# EAGLE board LLB (EAGLE 5.10)
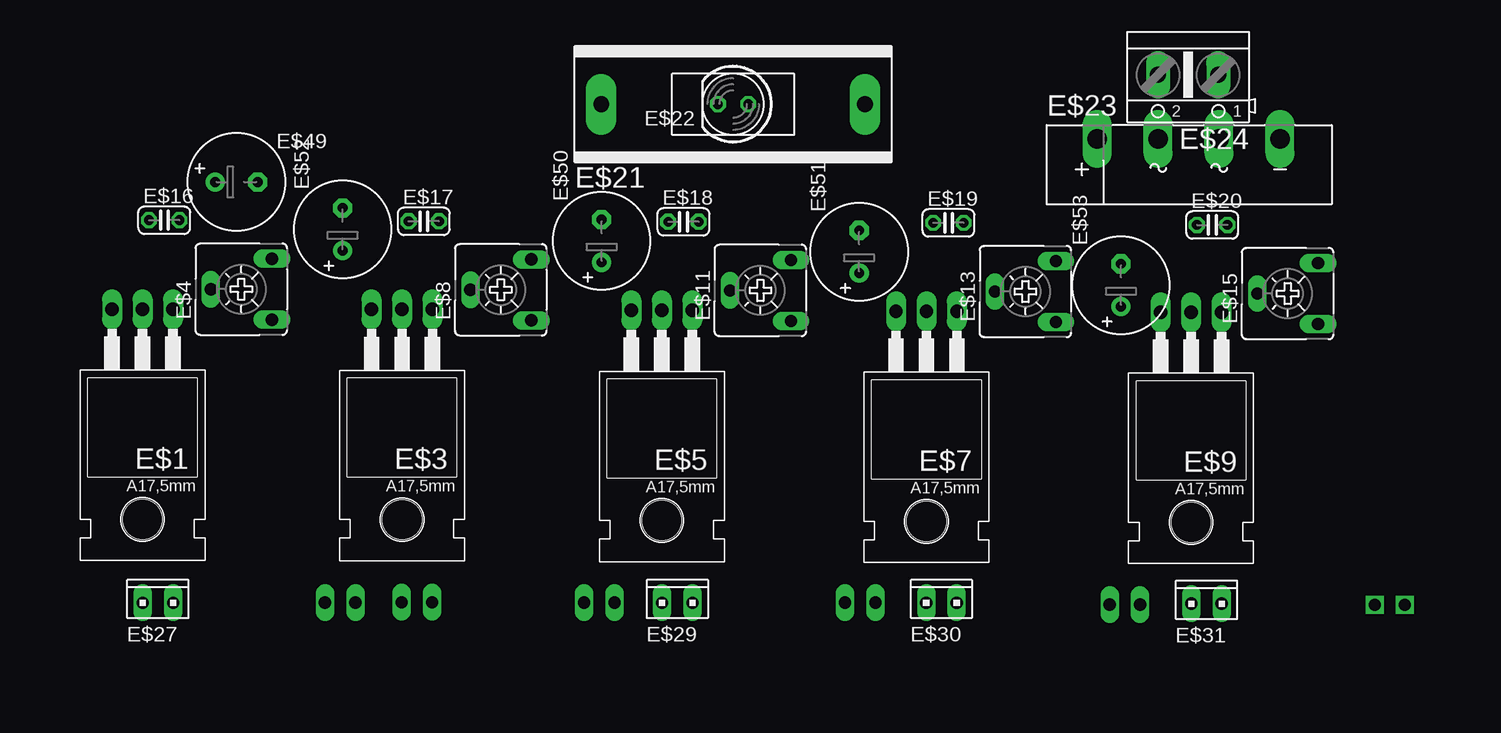
[diagram p0: board, top side]
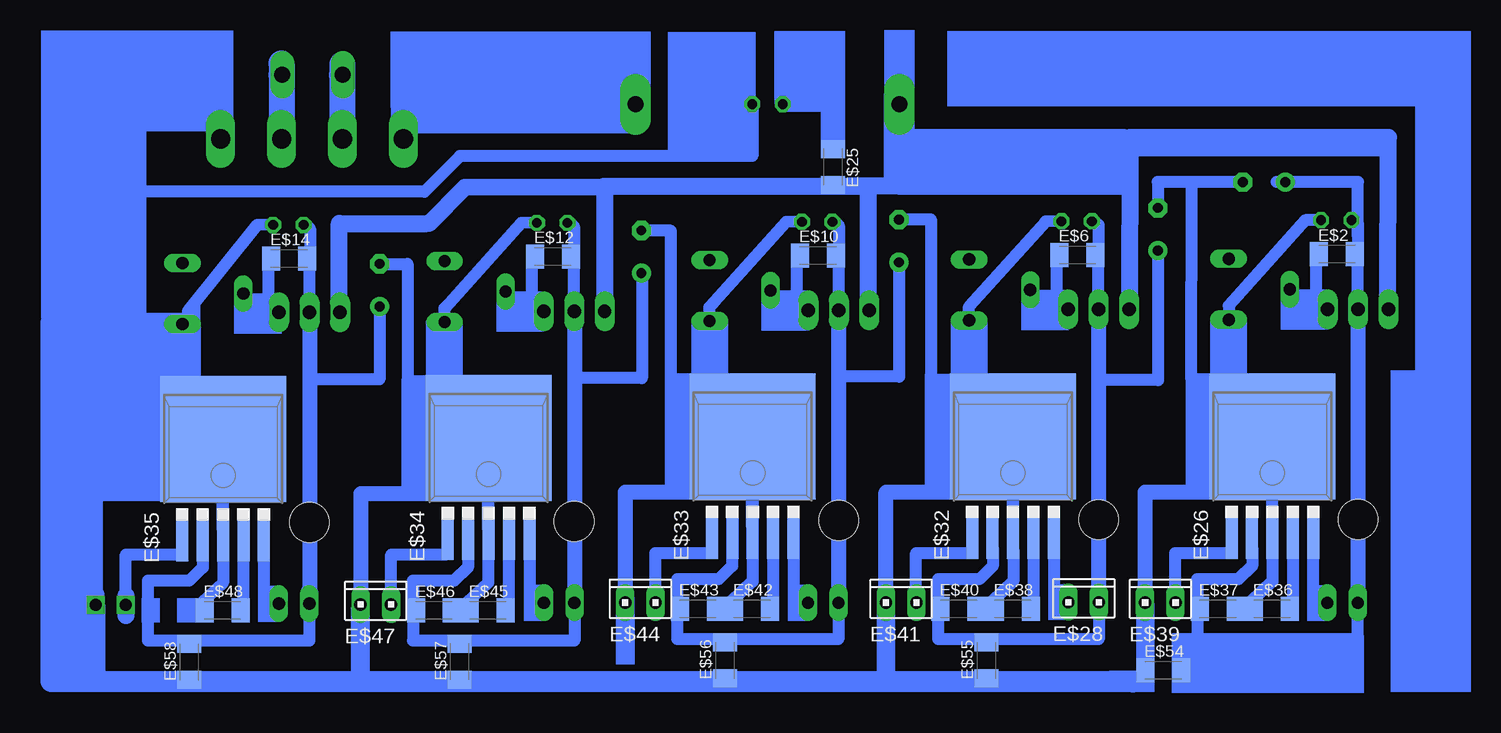
[diagram p1: board, bottom side, seen from below]

No outline drawn. Coordinates in mm, seen from the top.
Copper layers (1*16): Top 0.035mm / dielectric 1.5mm / Bottom 0.035mm
Design rules "default": minimum track width 10mil, minimum drill 24mil, track to track 8mil, track to pad 8mil, pad to pad 8mil, via to via 8mil, smd to smd 8mil, copper to edge 40mil, drill to drill 8mil, minimum pad ring 10mil, minimum via ring 8mil, stop-mask expansion 4mil, vias tented up to drill 0mil, thermal gap 10mil

## Footprints (pad centres in the part's own frame; a part is rotated, then mirrored left to right if it is on the bottom)
TO220 = drill 1.118 long: 1 -2.54,-6.35; 2 0,-6.35; 3 2.54,-6.35 | hole 3.302: 0,11.176
C1206K = smd 1.5 x 2: 1 -1.5,0; 2 1.5,0
CA6V = drill 1.016 long: A -2.54,-2.54; E 2.54,-2.54; S 0,2.54
C025-024X044 = drill 0.813 octagon: 1 -1.27,0; 2 1.27,0
SH22 = drill 1.321 pad 2.54 long: 1 -10.998,0; 2 10.998,0
LED5MM = drill 0.813 octagon: A -1.27,0; K 1.27,0
KBU = drill 1.6 long: + -7.62,2.54; - 7.62,2.54; AC1 -2.54,2.54; AC2 2.54,2.54
AK500/2 = drill 1.321 long: 1 -2.515,0; 2 2.515,0
TO220-58 = smd 1 x 3.4: 1 -3.4,-5; 2 -1.7,-5; 3 0,-5; 4 1.7,-5; 5 3.4,-5 | smd 10.5 x 10.5: 6 0,3.5
10X02MTA = drill 1.016 long: 1 1.27,0; 2 -1.27,0
E3,5-8 = drill 0.813 pad 1.6 round: + -1.778,0 | drill 0.813 pad 1.6 octagon: - 1.778,0

## Placement (x,y rotation side)
E$1  [TO220]  2.72,25.38 180 top
E$2  [C1206K]  4.47,36.32 0 bottom
E$3  [TO220]  24.35,25.37 180 top
E$4  [CA6V]  10.96,33.4 90 top
E$5  [TO220]  46.01,25.29 180 top
E$6  [C1206K]  26.1,36.27 0 bottom
E$7  [TO220]  68.07,25.21 180 top
E$8  [CA6V]  32.59,33.35 90 top
E$9  [TO220]  90.13,25.13 180 top
E$10  [C1206K]  47.74,36.22 0 bottom
E$11  [CA6V]  54.23,33.3 90 top
E$12  [C1206K]  69.83,36.13 0 bottom
E$13  [CA6V]  76.32,33.21 90 top
E$14  [C1206K]  91.82,35.96 0 bottom
E$15  [CA6V]  98.18,33.04 90 top
E$16  [C025-024X044]  4.53,39.16 0 top
E$17  [C025-024X044]  26.17,39.07 0 top
E$18  [C025-024X044]  47.81,39.03 0 top
E$19  [C025-024X044]  69.9,38.94 0 top
E$20  [C025-024X044]  91.89,38.76 0 top
E$21  [SH22]  51.96,48.83 0 top
E$22  [LED5MM]  51.95,48.84 180 top
E$23  [KBU]  89.92,43.4 0 top
E$24  [AK500/2]  89.88,51.29 180 top
E$25  [C1206K]  46.49,43.6 270 bottom
E$26  [TO220-58]  9.86,17.63 0 bottom
E$27  [10X02MTA]  4,7.26 0 top
E$28  [10X02MTA]  25.59,7.3 0 bottom
E$29  [10X02MTA]  47.31,7.26 0 top
E$30  [10X02MTA]  69.32,7.26 0 top
E$31  [10X02MTA]  91.41,7.18 0 top
E$32  [TO220-58]  31.48,17.63 0 bottom
E$33  [TO220-58]  53.18,17.62 0 bottom
E$34  [TO220-58]  75.2,17.52 0 bottom
E$35  [TO220-58]  97.33,17.42 0 bottom
E$36  [C1206K]  9.9,6.74 0 bottom
E$37  [C1206K]  14.41,6.74 0 bottom
E$38  [C1206K]  31.51,6.74 0 bottom
E$39  [10X02MTA]  19.2,7.27 0 bottom
E$40  [C1206K]  36.02,6.74 0 bottom
E$41  [10X02MTA]  40.81,7.27 0 bottom
E$42  [C1206K]  53.24,6.74 0 bottom
E$43  [C1206K]  57.75,6.74 0 bottom
E$44  [10X02MTA]  62.54,7.27 0 bottom
E$45  [C1206K]  75.27,6.62 0 bottom
E$46  [C1206K]  79.75,6.61 0 bottom
E$47  [10X02MTA]  84.61,7.11 0 bottom
E$48  [C1206K]  97.38,6.62 0 bottom
E$49  [E3,5-8]  10.55,42.34 0 top
E$50  [E3,5-8]  40.99,37.43 90 top
E$51  [E3,5-8]  62.46,36.53 90 top
E$52  [E3,5-8]  19.4,38.4 90 top
E$53  [E3,5-8]  84.28,33.74 90 top
E$54  [C1206K]  18.95,1.63 0 bottom
E$55  [C1206K]  33.71,2.45 90 bottom
E$56  [C1206K]  55.51,2.45 90 bottom
E$57  [C1206K]  77.6,2.35 90 bottom
E$58  [C1206K]  100.15,2.32 90 bottom

## Library data of the parts
E$1 E$3 E$5 E$7 E$9 = ref-packages
E$2 E$6 E$10 E$12 E$14 E$25 E$36-E$38 E$40 E$42 E$43 E$45 E$46 E$48 E$54-E$58 = resistor
E$4 E$8 E$11 E$13 E$15 = pot
E$16-E$20 E$49-E$53 = rcl
E$21 = fuse
E$22 = led
E$23 = rectifier
E$24 = con-ptr500
E$26 E$32-E$35 = ref-packages-longpad
E$27-E$31 E$39 E$41 E$44 E$47 = con-amp

## Tracks (layer width: path | path; a pad name or v marks a point on that pad's centre or on a via)
S$1
  Bottom 1.422: 21.79,31.51 21.74,46.06 0.19,46.06 0.24,31.77
S$2
  Bottom 1.422: 80.17,38.88 77.17,41.9 65.58,41.97
S$3
  Bottom 1.016: 2.72,31.75 2.72,36.8 2.76,36.8
  Bottom 1.27: 2.72,31.75 2.72,7.29
S$4
  Bottom 1.016: 5.27,31.78 6.21,32.72 6.21,36.01
S$5
  Bottom 1.016: 24.35,31.7 24.35,36.75 24.39,36.75
S$6
  Bottom 1.016: 26.9,31.73 27.84,32.67 27.84,35.96
S$7
  Bottom 1.016: 45.99,31.65 45.99,36.7 46.03,36.7
S$8
  Bottom 1.016: 48.54,31.68 49.48,32.62 49.48,35.91
S$9
  Bottom 1.016: 68.08,31.56 68.08,36.61 68.12,36.61
S$10
  Bottom 1.016: 70.63,31.59 71.57,32.53 71.57,35.82
S$11
  Bottom 1.016: 90.13,31.39 90.13,36.44
S$12
  Bottom 1.016: 92.49,31.42 93.55,32.88 93.55,36.17
S$13
  Bottom 1.016: 3.18,39.31 2.72,38.85 2.72,37.07
S$14
  Bottom 1.016: 5.82,39.18 7.12,39.15 13.5,32.03 13.5,30.79
S$15
  Bottom 1.016: 24.82,39.22 24.36,38.76 24.36,36.98
S$16
  Bottom 1.016: 27.46,39.09 28.76,39.06 35.14,31.94
S$17
  Bottom 1.016: 46.46,39.18 46,38.72 46,36.94
S$18
  Bottom 1.016: 49.1,39.05 50.4,39.02 56.78,31.9
S$19
  Bottom 1.016: 68.55,39.09 68.09,38.63 68.09,36.85
S$20
  Bottom 1.016: 71.19,38.96 72.49,38.93 78.87,31.81
S$21
  Bottom 1.016: 90.54,38.91 90.08,38.45 90.08,36.67
S$22
  Bottom 1.016: 93.18,38.78 94.48,38.75 100.25,31.57
S$23
  Bottom 1.016: 35.17,30.73 35.17,31.87 35.14,31.9
S$24
  Bottom 1.016: 56.8,30.72 56.8,31.89 56.5,32.19
S$25
  Bottom 1.016: 78.86,30.64 78.86,31.83 78.6,32.09
S$26
  Bottom 1.016: 99.7,30.66 99.7,31.97
S$27
  Bottom 2.184: 87.4,52.16 87.42,51.29 87.42,45.75
S$28
  Bottom 2.184: 92.45,52.21 92.46,51.28 92.46,45.96
S$29
  Bottom 2.184: 62.98,48.73 82.3,48.73 82.23,44.74
S$30
  Bottom 1.778: 100.75,30.55 104.63,30.55 104.62,47.46 97.53,47.46 97.48,45.25
S$31
  Bottom 1.016: 53.2,48.86 53.2,44.5 77.59,44.5 80.55,41.54 104.27,41.54 104.27,41.6
S$32
  Bottom 1.27: 24.37,31.84 24.37,7.38
S$33
  Bottom 1.27: 46.03,31.75 46.03,7.29
S$34
  Bottom 1.27: 68.04,31.75 68.04,7.29
S$35
  Bottom 1.27: 90.13,31.67 90.13,8.19 90.13,7.21
  Bottom 1.422: 90.13,8.19 90.13,6.53 | 107.93,7.94 107.93,6.28 | 105.43,7.85 105.43,6.19
S$36
  Bottom 1.016: 6.48,12.17 6.48,8.26 5.26,8.26
S$37
  Bottom 1.016: 28.07,12.25 28.07,8.34 26.85,8.34
S$38
  Bottom 1.016: 49.78,12.19 49.78,8.28 48.56,8.28
S$39
  Bottom 1.016: 71.78,12.19 71.78,8.28 70.56,8.28
S$40
  Bottom 1.016: 93.93,12.1 93.93,8.19 92.71,8.19
S$41
  Bottom 1.016: 9.85,13.98 9.85,17.13
S$42
  Bottom 1.016: 31.5,13.57 31.5,17.48 31.48,17.48
S$43
  Bottom 1.016: 53.17,13.41 53.17,17.53 53.23,17.7
S$44
  Bottom 1.016: 75.2,13.11 75.2,16.9 75.25,16.9
S$45
  Bottom 1.016: 97.32,12.91 97.32,17.09
S$46
  Bottom 1.016: 8.16,12.37 8.16,6.29
S$47
  Bottom 1.016: 9.85,11.71 9.85,9.04 11.65,7.35
S$48
  Bottom 1.016: 11.55,11.83 11.55,10.32 12.69,9.21 16.13,9.21 16.13,6.36
S$49
  Bottom 1.016: 16.13,6.49 16.13,4.21 2.74,4.21 2.74,7.29
S$50
  Bottom 1.016: 17.95,7.27 17.95,11.41 13.39,11.41
S$51
  Bottom 1.27: 20.46,7.26 20.46,16.49 13.47,16.49
S$52
  Bottom 1.016: 31.46,13.98 31.46,17.13
S$53
  Bottom 1.016: 29.77,12.37 29.77,6.29
S$54
  Bottom 1.016: 31.46,11.71 31.46,9.04 33.26,7.35
S$55
  Bottom 1.016: 33.16,11.83 33.16,10.32 34.3,9.21 37.74,9.21 37.74,6.36
S$56
  Bottom 1.016: 37.74,6.49 37.74,4.21 24.35,4.21
S$57
  Bottom 1.016: 39.56,7.27 39.56,11.41 35,11.41
S$58
  Bottom 1.27: 42.07,7.26 42.07,16.49 35.08,16.49
S$59
  Bottom 1.016: 53.23,13.57 53.23,17.48
S$60
  Bottom 1.016: 53.19,13.98 53.19,17.13
S$61
  Bottom 1.016: 51.5,12.37 51.5,6.29
S$62
  Bottom 1.016: 53.19,11.71 53.19,9.04 54.99,7.35
S$63
  Bottom 1.016: 54.89,11.83 54.89,10.32 56.03,9.21 59.47,9.21 59.47,6.36
S$64
  Bottom 1.016: 59.47,6.49 59.47,4.21 46.08,4.21
S$65
  Bottom 1.016: 61.29,7.27 61.29,11.41 56.73,11.41
S$66
  Bottom 1.27: 63.8,7.26 63.8,16.49 56.81,16.49
S$67
  Bottom 1.016: 75.2,13.29 75.2,17.41
S$68
  Bottom 1.016: 75.26,13.45 75.26,17.36
S$69
  Bottom 1.016: 75.22,13.86 75.22,17.01
S$70
  Bottom 1.016: 73.53,12.25 73.53,6.17
S$71
  Bottom 1.016: 75.22,11.59 75.22,8.92 77.02,7.23
S$72
  Bottom 1.016: 76.92,11.71 76.92,10.2 78.06,9.09 81.5,9.09 81.5,6.24
S$73
  Bottom 1.016: 81.5,6.37 81.5,4.09 68.05,4.09 68.05,7.28
S$74
  Bottom 1.016: 83.32,7.15 83.32,11.29 78.76,11.29
S$75
  Bottom 1.27: 85.83,7.14 85.83,16.37 78.84,16.37
S$76
  Bottom 1.016: 97.31,13.11 97.31,16.9
S$77
  Bottom 1.016: 97.31,13.29 97.31,17.41
S$78
  Bottom 1.016: 97.37,13.45 97.37,17.36
S$79
  Bottom 1.016: 97.33,13.86 97.33,17.01
S$80
  Bottom 1.016: 95.64,12.25 95.64,6.17
S$81
  Bottom 1.016: 97.33,11.59 97.33,8.92 99.13,7.23
S$82
  Bottom 1.016: 99.03,11.71 99.03,10.2 100.17,9.09 103.61,9.09 103.61,6.24
S$83
  Bottom 1.016: 103.61,6.37 103.61,4.09 90.14,4.09 90.14,7.2
S$84
  Bottom 1.016: 105.43,7.15 105.43,11.29 100.87,11.29
S$85
  Bottom 1.27: 107.94,7.14 107.94,16.37 100.95,16.37
S$86  (via drill 1)
  other vias: 107.93,7.1
S$87  (via drill 1)
  other vias: 105.43,7.1
S$88
  Bottom 1.016: 24.34,7.31 24.34,4.22 26.38,4.22
S$89
  Bottom 1.016: 46.05,7.26 46.05,4.22 48.17,4.22
S$90
  Bottom 1.778: 104.19,30.64 111.64,30.64 111.65,0.71 21.48,0.68
S$91
  Bottom 1.422: 65.52,31.59 65.52,41.97 43.52,41.97 43.52,31.73
S$92
  Bottom 1.27: 40.41,46.04 40.5,41.98
  Bottom 1.422: 22.13,46.04 40.41,46.04 | 40.5,41.98 45.3,41.98
S$93
  Bottom 1.016: 2.74,37.8 2.74,42.35 9.52,42.35
S$94
  Bottom 1.016: 40.97,39.24 38.34,39.24 38.34,25.88 34.88,25.88
S$95
  Bottom 1.016: 12.34,42.34 19.41,42.34 19.41,40.12
S$96
  Bottom 1.016: 13.38,25.88 16.6,25.88 16.58,42.3
S$97
  Bottom 1.016: 19.39,36.67 19.4,25.82 24.49,25.82
S$98
  Bottom 1.016: 40.97,35.65 40.97,26.12 45.79,26.12
S$99
  Bottom 1.016: 55.98,25.86 60,25.86 60,38.28 62.58,38.28
S$100
  Bottom 1.016: 62.41,34.77 62.41,25.98 68.03,25.98
S$101
  Bottom 1.422: 87.65,31.45 87.65,38.89 80.32,38.89
S$102
  Bottom 1.016: 84.3,35.51 81.95,35.51 81.95,25.74 77.56,25.74
S$103
  Bottom 1.016: 84.3,31.97 84.3,25.89 89.98,25.89
(copper drawn outside any net)
  shapes: Bottom area x51